# Altium PCB main.PcbDoc
Units mil, origin at the board's own origin, x right, y up, seen from the top; angles counter-clockwise.
Board outline 6000 x 4000 mil, 2 copper layers (Top Layer, Bottom Layer); 14 components, 8 nets, 69 pads, 0 vias.
Unrouted connection lines stored in the file: 23.
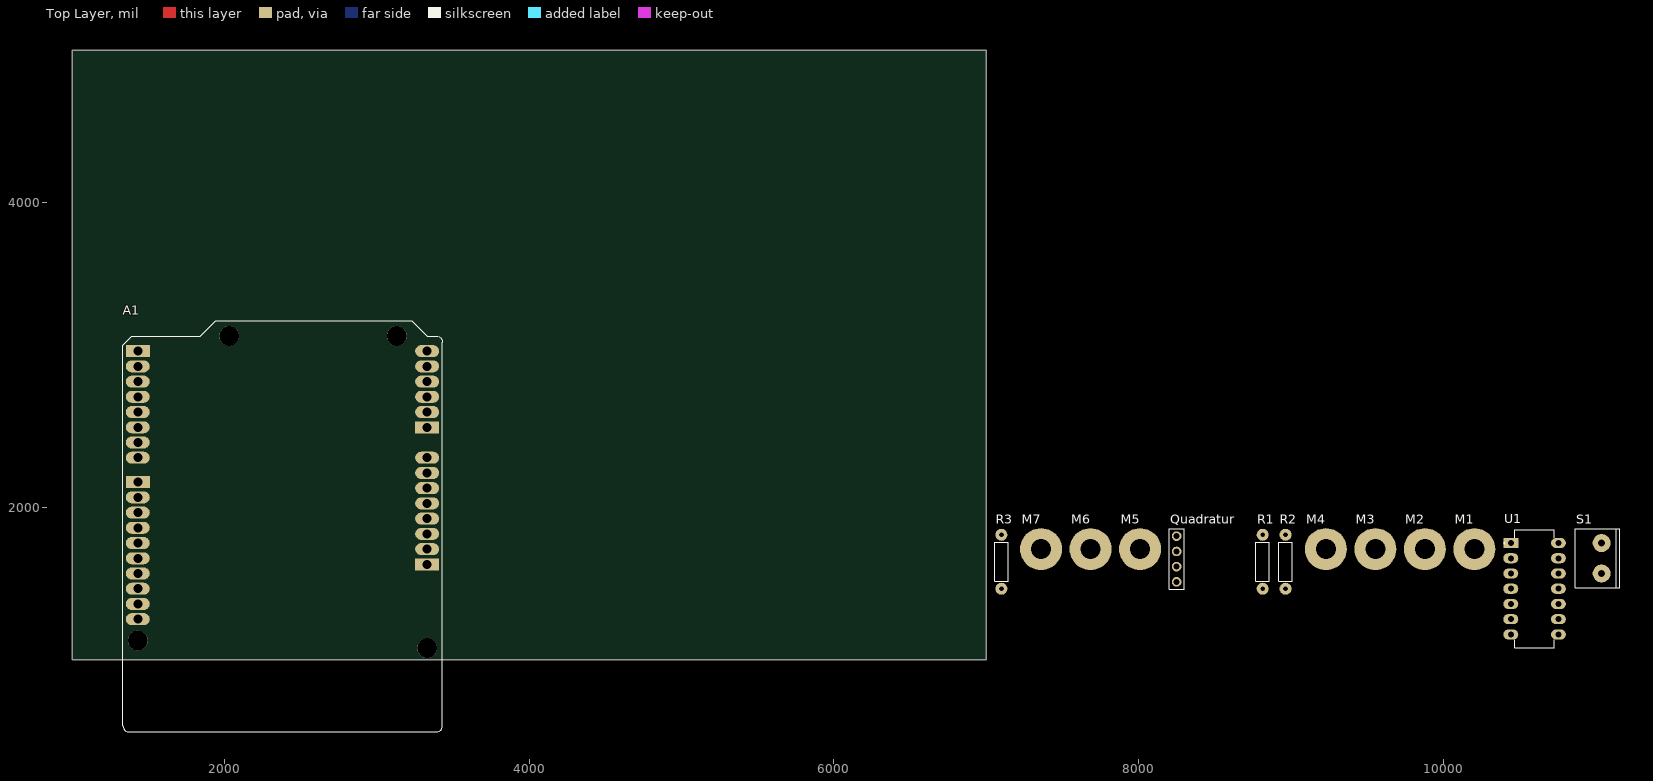
[diagram p0: Top Layer view]
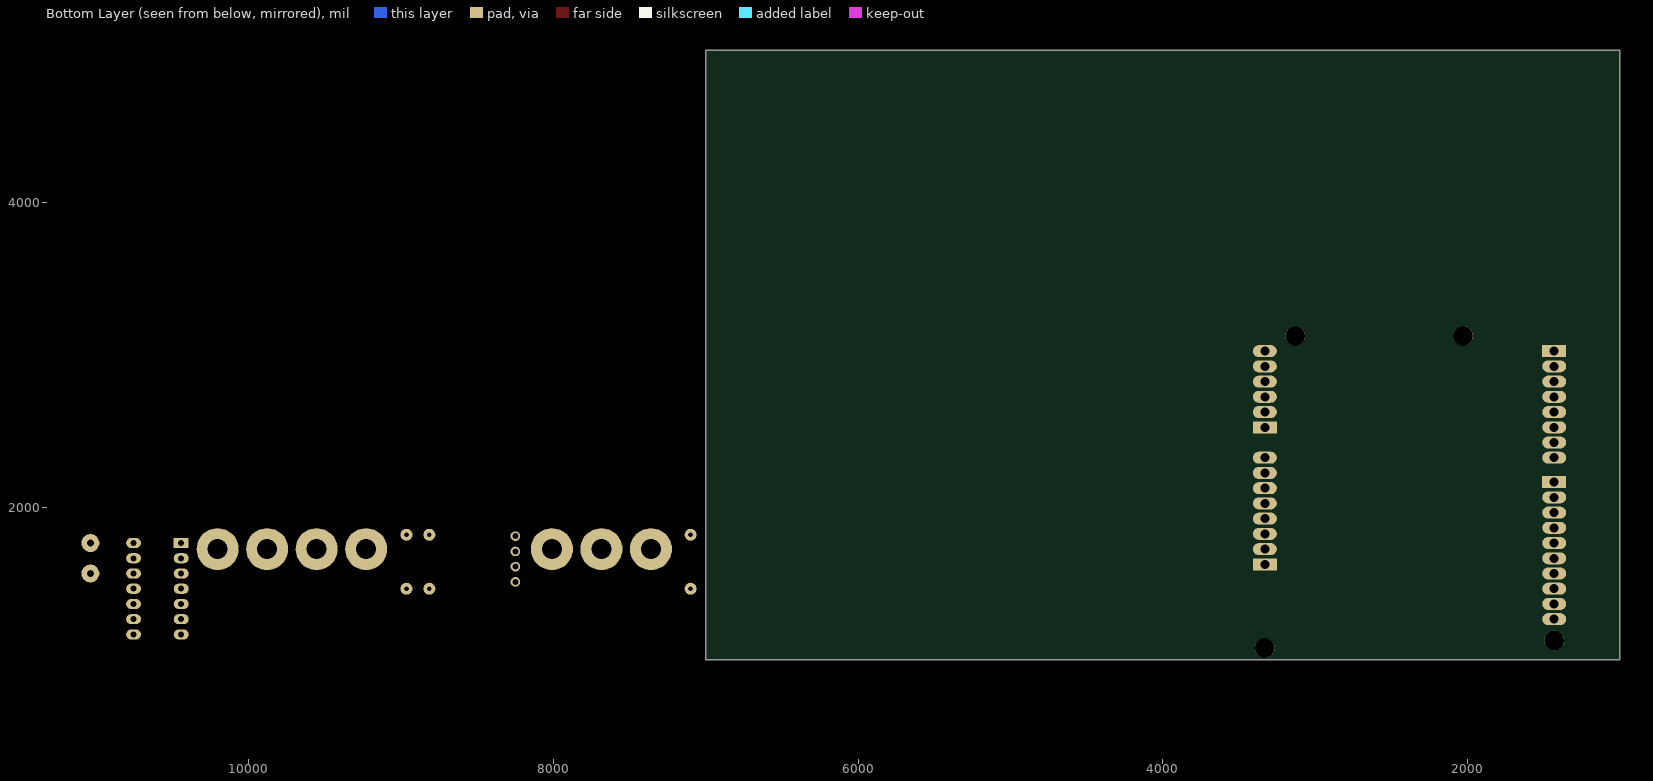
[diagram p1: Bottom Layer view, seen from below]

## Layer stack, top to bottom
Top Solder: solder mask 0.4, Solder Resist, Dk 3.5
Top Layer: signal copper 1.4
Dielectric 1: dielectric 12.6, FR-4, Dk 4.8
Bottom Layer: signal copper 1.4
Bottom Solder: solder mask 0.4, Solder Resist, Dk 3.5

## Board outline
1000,1000 7000,1000 7000,5000 1000,5000

## Design rules (kind name [scope] priority, off if disabled: settings)
Clearance [All] p1: gap=10 ignorepadtopadclearanceinfootprint=FALSE
PolygonConnect [All] p1: connectstyle=Relief reliefconductorwidth=10 reliefentries=4 polygonreliefangle="90 Angle" airgapwidth=10
RoutingVias [All] p1: holewidth=28 width=50 viastyle="Through Hole" minholewidth=28 minwidth=50 maxholewidth=28 maxwidth=50
SolderMaskExpansion [All] p1: expansion=4 istentingtop=FALSE
SupplyNets "Schematic Supply Nets_2" [InNet('+12')] p1: voltage=0.000
SupplyNets "Schematic Supply Nets_1" [InNet('GND')] p2: voltage=0.000
SupplyNets "Schematic Supply Nets" [InNet('+5')] p3: voltage=0.000
Width [All] p1: maxlimit=10 minlimit=10 preferedwidth=10
30 further rules are at their usual default settings.

## Components (designator, comment, footprint, x,y, rotation, side; value= is the part's Value field where it differs from the comment)
A1 "A000066" ARDUINO_A000066 3430,525 r90 top
M1 "Screw Hole" "M3 Hole" 10205,1725 r0 top
M2 "Screw Hole" "M3 Hole" 9880,1725 r0 top
M3 "Screw Hole" "M3 Hole" 9555,1725 r0 top
M4 "Screw Hole" "M3 Hole" 9230,1725 r0 top
M5 "Screw Hole" "M3 Hole" 8010,1725 r0 top
M6 "Screw Hole" "M3 Hole" 7685,1725 r0 top
M7 "Screw Hole" "M3 Hole" 7360,1725 r0 top
Quadratur "Header 1x4" "Header 1x4" 8250,1510 r90 top
R1 "Resistor" "RES THT 9mm" 8815,1465 r90 top value=10k
R2 "Resistor" "RES THT 9mm" 8965,1465 r90 top value=10k
R3 "Resistor" "RES THT 9mm" 7100,1465 r90 top value=1k
S1 "Power_in" Screw-2 11040,1565 r90 top
U1 "SN74HC14N" DIP794W45P254L1969H508Q14 10600,1465 r0 top

## Footprints (in the part's own frame and the unit in brackets; to place one, negate y for a bottom-side part, rotate by r counter-clockwise, add the part's x,y. Pads: shape width x height; smd on the part's side, far side on the other; paste and mask are expansions set on the pad)
ARDUINO_A000066 [mm]
  oval 2x4 hole 1.5: 3V3(35.56,2.54) 5V(38.1,2.54) A1(53.34,2.54) A2(55.88,2.54) A3(58.42,2.54) A4(60.96,2.54) A4(SDA)(21.336,50.8) A5(63.5,2.54) A5(SCL)(18.796,50.8) AREF(23.876,50.8) D1(60.96,50.8) D2(58.42,50.8) D3(55.88,50.8) D4(53.34,50.8) D5(50.8,50.8) D6(48.26,50.8) D7(45.72,50.8) D9(39.116,50.8) D10(36.576,50.8) D11(34.036,50.8) D12(31.496,50.8) D13(28.956,50.8) GND_1(43.18,2.54) GND_2(40.64,2.54) GND_3(26.416,50.8) IOREF(30.48,2.54) RST(33.02,2.54) VIN(45.72,2.54)
  rect 2x4 hole 1.5: A0(50.8,2.54) D0(63.5,50.8) D8(41.656,50.8) P1(27.94,2.54)
  round 3.3 hole 3.3 unplated: ""(13.97,2.54) ""(15.24,50.8) ""(66.04,7.62) ""(66.04,35.56)
  silkscreen extent 0,0 68.53,53.3, body extent -6.29,0 68.78,53.34, height 11.87
DIP794W45P254L1969H508Q14 [mm]
  rect 2.5x1.676 hole 1: 1(-3.97,7.62)
  oval 2.5x1.676 hole 1: 2(-3.97,5.08) 3(-3.97,2.54) 4(-3.97,0) 5(-3.97,-2.54) 6(-3.97,-5.08) 7(-3.97,-7.62) 8(3.97,-7.62) 9(3.97,-5.08) 10(3.97,-2.54) 11(3.97,0) 12(3.97,2.54) 13(3.97,5.08) 14(3.97,7.62)
  silkscreen extent -5.15,-9.84 3.3,9.84, body extent -4.1,-9.65 4.1,9.65, height 5.08
"Header 1x4" [mm]
  round 1.6 hole 1: 1(0,0) 2(2.54,0) 3(5.08,0) 4(7.62,0)
  silkscreen extent -1.25,-1.25 8.87,1.25, body extent -1.27,-1.27 8.89,1.27, height 8.89
"M3 Hole" [mm]
  round 7 hole 3.3 mask+0: 1(0,0)
"RES THT 9mm" [mm]
  round 2 hole 0.8: 1(0,0) 2(9,0)
  silkscreen extent 1.28,-1.12 7.73,1.12, body extent -0.32,-1.13 9.28,1.14, height 2.36
Screw-2 [mm] "Screw Terminal with 2 connections"
  round 3 hole 1.2: 1(0,0) 2(5.075,0)
  silkscreen extent -2.37,-3.03 7.45,4.43, body extent -3.07,-3.1 7.53,4.5, height 10

## Part data
A1: "Microcontroller board based on the ATmega328P.", Package="Non-Standard Arduino", Availability="Not in stock", Check_prices=https://www.snapeda.com/parts/Arduino%20Uno%20Rev3/Arduino/view-part/?ref=eda, MF=Arduino, MP="Arduino Uno Rev3", Price=None, SnapEDA_Link=https://www.snapeda.com/parts/Arduino%20Uno%20Rev3/Arduino/view-part/?ref=snap
S1: library part "Screw 2"
U1: "6-ch, 2-V to 6-V inverters with Schmitt-Trigger inputs", Package="PDIP-14 Texas Instruments", Availability="In Stock", Check_prices=https://www.snapeda.com/parts/SN74HC14N/Texas+Instruments/view-part/?ref=eda, MF="Texas Instruments", MP=SN74HC14N, Price=None, Purchase-URL=https://pricing.snapeda.com/search/part/SN74HC14N/?ref=eda, SnapEDA_Link=https://www.snapeda.com/parts/SN74HC14N/Texas+Instruments/view-part/?ref=snap

## Nets (pads, with @x,y where several pads share a name; then routed paths per layer and width w, separated by ;. In a path a pad name is that pad's centre, name@x,y a point inside that pad or via, vN(x,y) a via of type N, cw(c..) or ccw(c..) an arc to the next point about the centre after c; other vN are vias at no path point)
+5: A1.5V R1.2 R2.2 R3.1 U1.14
+12: A1.VIN S1.1
Encoder_A: Quadratur.1 R1.1 U1.1
Encoder_B: Quadratur.2 R2.1 U1.3
GND: A1.GND_1 A1.GND_2 M1.1 M2.1 M3.1 M4.1 M5.1 M6.1 M7.1 Quadratur.4 S1.2 U1.7
NetQuadratur_3: Quadratur.3 R3.2
Schmitt_A: A1.D2 U1.2
Schmitt_B: A1.D3 U1.4
pads on no net: A1. A1.3V3 A1.A0 A1.A1 A1.A2 A1.A3 A1.A4 A1.A4(SDA) A1.A5 A1.A5(SCL) A1.AREF A1.D0 A1.D1 A1.D4 A1.D5 A1.D6 A1.D7 A1.D8 A1.D9 A1.D10 A1.D11 A1.D12 A1.D13 A1.GND_3 A1.IOREF A1.P1 A1.RST U1.5 U1.6 U1.8 U1.9 U1.10 U1.11 U1.12 U1.13